# Altium PCB PCB1.PcbDoc
Units mm, origin at the board's own origin, x right, y up, seen from the top; angles counter-clockwise.
Board outline 91.78 x 55.02 mm, 2 copper layers (Top Layer, Bottom Layer); 18 components, 17 nets, 57 pads, 0 vias.
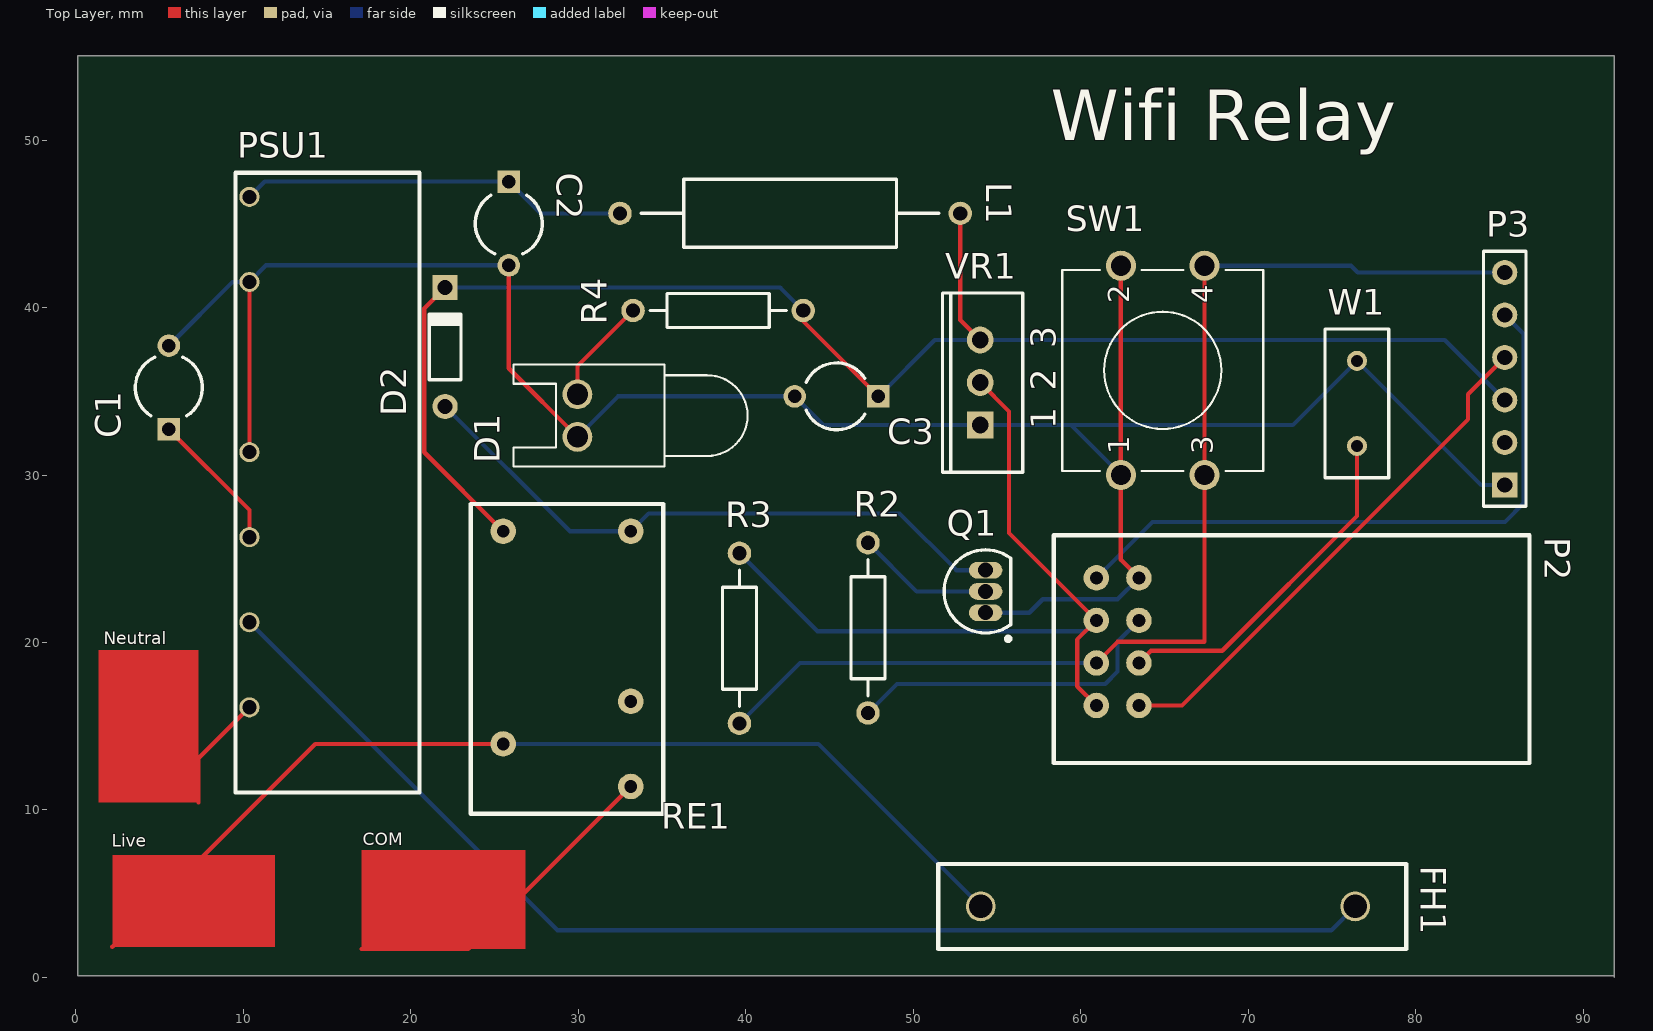
[diagram p0: Top Layer view]
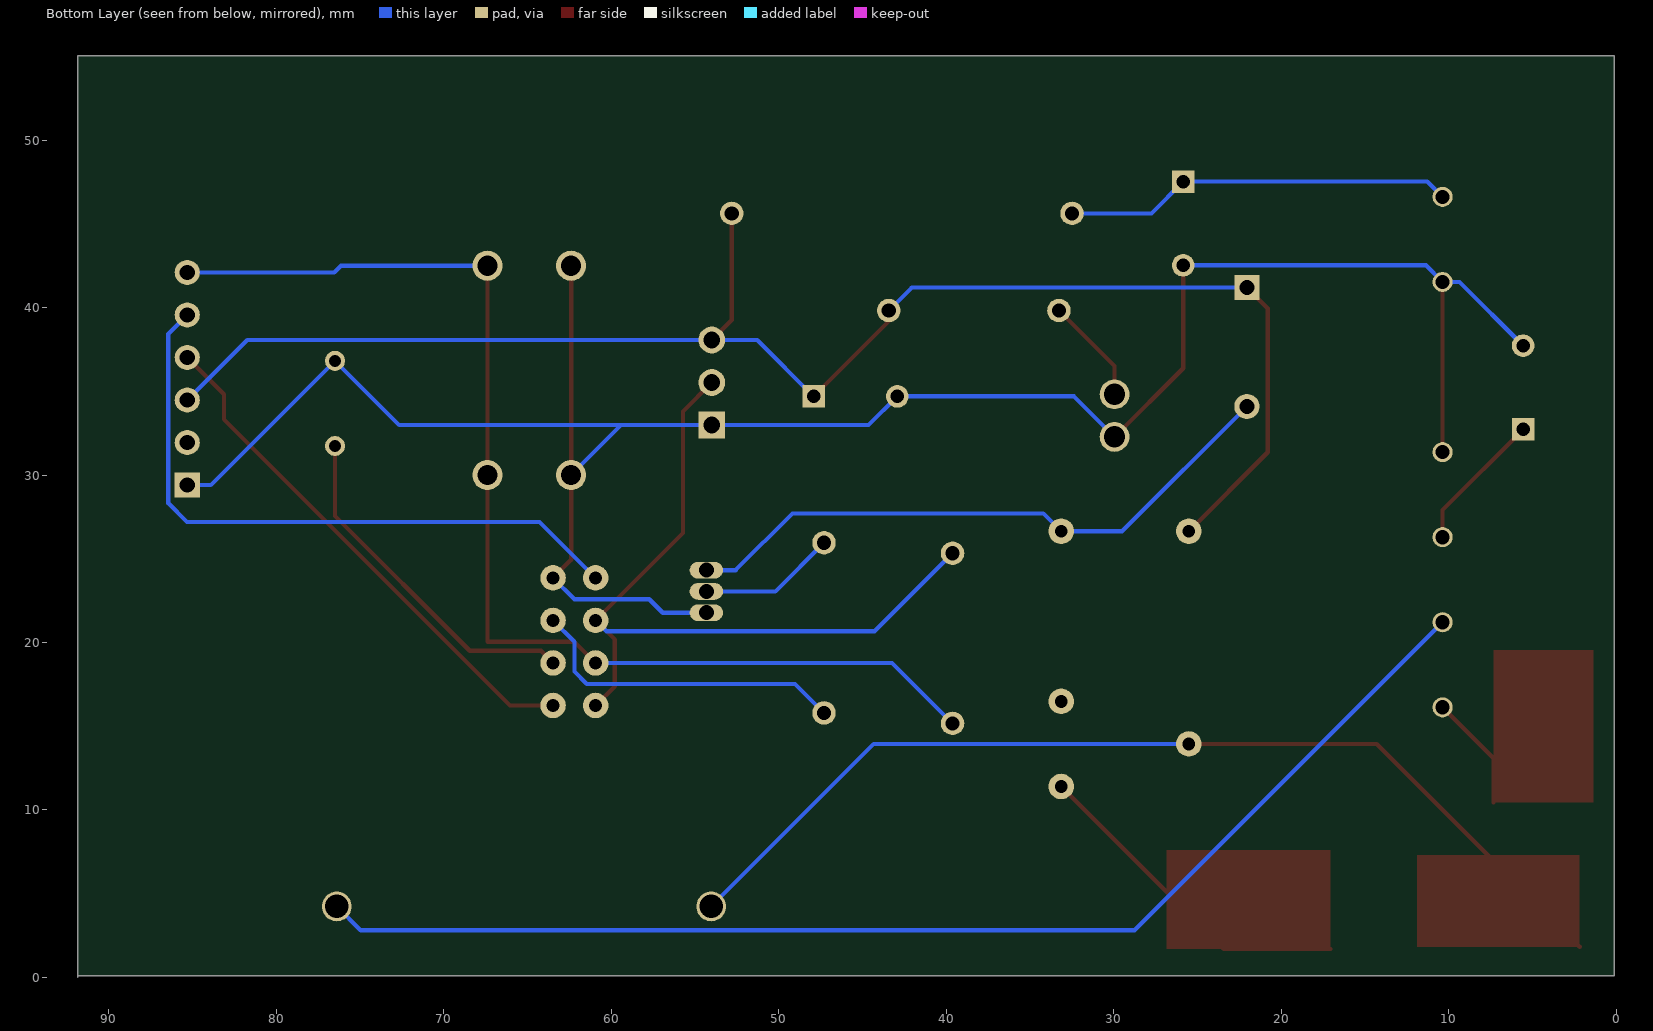
[diagram p1: Bottom Layer view, seen from below]

## Layer stack, top to bottom
Top Solder: solder mask 0.0102, Solder Resist, Dk 3.5
Top Layer: signal copper 0.0356
Dielectric 1: dielectric 0.32, FR-4, Dk 4.8
Bottom Layer: signal copper 0.0356
Bottom Solder: solder mask 0.0102, Solder Resist, Dk 3.5

## Board outline
0.125,55.05 91.875,55.05 91.875,0.025 91.875,0.1 0.1,0.1

## Design rules (kind name [scope] priority, off if disabled: settings)
Clearance [All] p1: gap=0.254
PolygonConnect [All] p1: connectstyle=Relief reliefconductorwidth=0.254 reliefentries=4 polygonreliefangle="90 Angle" airgapwidth=0.254
RoomDefinition Sheet1 [InComponentClass('Sheet1')] p1: confinementstyle=ConfineIn formatcopy=TRUE lockcomponents=FALSE outline 0.1,0.1 91.775,0.1 91.775,54.775 0.1,54.775
RoutingVias [All] p1: holewidth=0.711 width=1.27 viastyle="Through Hole" minholewidth=0.711 minwidth=1.27 maxholewidth=0.711 maxwidth=1.27
SolderMaskExpansion [All] p1: expansion=0.102
Width [All] p1: maxlimit=0.254 minlimit=0.254 preferedwidth=0.254
30 further rules are at their usual default settings.

## Components (designator, comment, footprint, x,y, rotation, side; value= is the part's Value field where it differs from the comment)
C1 "Cap Pol1" CAPR5-4X5 5.55,35.225 r90 top
C2 "Cap Pol1" CAPR5-4X5 25.85,45.025 r270 top
C3 "Cap Pol1" CAPR5-4X5 45.425,34.7 r180 top
D1 "LED0" LED-0 29.95,33.55 r90 top
D2 "Comment" DO-35 22.05,37.65 r90 top
FH1 "Fuse Holder" "Fuse Holder" 51.5,1.7 r0 top
L1 "Inductor" AXIAL-0.8 42.65,45.625 r0 top
P2 "ESP8266" ESP8266 58.4,26.4 r270 top
P3 "FTDI" HDR1X6 85.325,29.4 r90 top
PSU1 "PBK-3-5" PBK-3-5 20.525,11.05 r90 top
Q1 "2N2222" TO-92A 54.325,23.05 r0 top
R2 "Res2" AXIAL-0.4 47.3,20.875 r90 top
R3 "Res2" AXIAL-0.4 39.625,20.25 r90 top
R4 "Res2" AXIAL-0.4 38.35,39.825 r180 top
RE1 "Relay" Relay 35.075,28.275 r180 top
SW1 "RESET" 430456085736 64.9,36.25 r90 top
VR1 "LM1117" TO-220-AB 54,35.525 r90 top
W1 "FLASH" RAD-0.2 76.5,34.275 r90 top

## Footprints (in the part's own frame and the unit in brackets; to place one, negate y for a bottom-side part, rotate by r counter-clockwise, add the part's x,y. Pads: shape width x height; smd on the part's side, far side on the other; paste and mask are expansions set on the pad)
430456085736 [mm] "12*12mm vertical type,THT,  height 8.5mm, salmon actuator, 360gf, Bulk"
  round 1.8 hole 1.2: 1(-6.25,2.5) 2(6.25,2.5) 3(-6.25,-2.5) 4(6.25,-2.5)
  silkscreen extent -6,-6 6,6, body extent -6.99,-6 6.99,6, height 8.6
AXIAL-0.4 [mm] "Axial Device, Thru-Hole; 2 Leads; 0.4 in Pin Spacing"
  round 1.4 hole 0.85: 1(-5.08,0) 2(5.08,0)
  silkscreen extent -4.06,-1.02 4.06,1.02
AXIAL-0.8 [mm] "Axial Device, Thru-Hole; 2 Leads; 0.8 in Pin Spacing"
  round 1.4 hole 0.85: 1(-10.16,0) 2(10.16,0)
  silkscreen extent -8.89,-2.03 8.89,2.03
CAPR5-4X5 [mm] "Capacitor; 2 Leads"
  rect 1.35x1.35 hole 0.8: 1(-2.5,0)
  round 1.35 hole 0.8: 2(2.5,0)
  silkscreen extent -1.69,-2 1.82,2
DO-35 [mm] "Diode, Axial; Body 3.8 x 1.9 mm (LxDia. max), Lead Dia. 0.53 mm (max)"
  round 1.5 hole 0.9: 1(-3.55,0)
  rect 1.5x1.5 hole 0.9: 2(3.55,0)
  silkscreen extent -1.95,-0.95 2.05,0.95
ESP8266 [mil]
  round 60 hole 30: 1(100,200) 2(200,200) 3(300,200) 4(400,200) 5(100,100) 6(200,100) 7(300,100) 8(400,100)
  silkscreen extent 0,0 535,1118
"Fuse Holder" [mil] "5mm x 20mm"
  round 70 hole 55: 1(100,100) 2(980,100)
  silkscreen extent 0,0 1100,200
HDR1X6 [mm] "Connector; Header; 6 Position"
  rect 1.5x1.5 hole 0.9: 1(0,0)
  round 1.5 hole 0.9: 2(2.54,0) 3(5.08,0) 4(7.62,0) 5(10.16,0) 6(12.7,0)
  silkscreen extent -1.27,-1.27 13.97,1.27
LED-0 [mil] "LED; 2 Leads"
  round 70 hole 50: 1(50,0) 2(-50,0)
  silkscreen extent -120,-400 120,150
PBK-3-5 [mm] "120Vac to 5VDC"
  round 1.2 hole 0.85: 1(5.08,10.16) 3(10.16,10.16) 5(15.24,10.16) 7(20.32,10.16) 10(30.48,10.16) 12(35.56,10.16)
  silkscreen extent 0,0 37,11
RAD-0.2 [mm] "Radial Cap, Thru-Hole; 2 Leads; 0.2 in Pin Spacing"
  round 1.2 hole 0.7: 1(-2.54,0) 2(2.54,0)
  silkscreen extent -4.44,-1.91 4.45,1.9
Relay [mil]
  round 60 hole 30: 1(76.38,64.17) 2(376.38,64.17) 3(76.38,464.17) 4(76.38,664.17) 5(376.38,564.17)
  silkscreen extent 0,0 453,728
TO-92A [mm] "TO, Flat Index; 3 In-Line, Axial Leads; Body Dia. 4.5mm; Leads 0.51 x 0.48 mm (max)"
  oval 2x1 hole 0.9: 1(0,-1.27) 2(0,0) 3(0,1.27)
  silkscreen extent -2.48,-2.95 1.5,2.48, body extent -2.5,-2.5 1.5,2.5, height 6.86
TO-220-AB [mm] "TO, Thru-Hole, Vertical, Heatsink Mounted; 3 In-Line Leads; Pitch 2.54 mm"
  rect 1.6x1.6 hole 1: 1(-2.54,0)
  round 1.6 hole 1: 2(0,0) 3(2.54,0)
  silkscreen extent -5.35,-2.55 5.35,2.25

## Part data
C1 C2 C3: "Polarized Capacitor (Radial)"
D1: "Typical INFRARED GaAs LED"
D2: library part "Diode 1N914", "High Conductance Fast Diode"
P2: library part "Header 4X2A", "Header, 4-Pin, Dual row"
P3: library part "Header 6", "Header, 6-Pin"
PSU1: "120Vac to 5Vdc psu"
Q1: library part 2N3904, "NPN General Purpose Amplifier"
R2 R3 R4: "Resistor"
SW1: library part "WE-Tact Switches WS-TATV 430456085736", "WS-TATV THT Tact Switch 12X12 mm"
VR1: library part "Volt Reg", "Voltage Regulator"
W1: library part Jumper, "Jumper Wire"

## Nets (pads, with @x,y where several pads share a name; then routed paths per layer and width w, separated by ;. In a path a pad name is that pad's centre, name@x,y a point inside that pad or via, vN(x,y) a via of type N, cw(c..) or ccw(c..) an arc to the next point about the centre after c; other vN are vias at no path point)
3V3: P2.6 P2.8 R3.2 VR1.2 | length 46.6
  Top Layer w0.254: VR1.2 55.728,33.797 55.728,26.532 P2.6 59.792,20.172 59.792,17.388 P2.8
  Bottom Layer w0.254: R3.2 44.279,20.676 60.296,20.676 P2.6
GND: C1.2 C2.2 C3.2 D1.2 P2.1 P3.1 PSU1.7 PSU1.10 Q1.1 SW1.1 SW1.2 VR1.1 W1.2 | length 139.5
  Top Layer w0.254: PSU1.7 PSU1.10 ; C2.2 25.85,36.38 D1.2 ; SW1.2 SW1.1 62.4,24.94 P2.1
  Bottom Layer w0.254: C1.2 9.355,41.53 PSU1.10 11.36,42.525 C2.2 ; D1.2 32.37,34.7 C3.2 44.64,32.985 VR1.1 59.415,32.985 ; Q1.1 56.934,21.78 57.734,22.581 62.201,22.581 P2.1 ; SW1.1 59.415,32.985 ; P3.1 83.915,29.4 W1.2 72.67,32.985 59.415,32.985
GPIO0: P2.3 W1.1 | length 20.8
  Top Layer w0.254: P2.3 64.207,19.507 68.453,19.507 76.5,27.554 W1.1
GPIO2: P2.2 R2.1 | length 19.5
  Bottom Layer w0.254: R2.1 49.031,17.526 61.468,17.526 62.205,18.263 62.205,20.045 P2.2
LIVE: FH1.1 RE1.5 | length 60.9
  Top Layer w0.254: 2.175,1.825 14.295,13.945 RE1.5
  Bottom Layer w0.254: RE1.5 44.335,13.945 FH1.1
NetC1_1: C1.1 PSU1.5 | length 8.4
  Top Layer w0.254: C1.1 10.365,27.91 PSU1.5
NetC2_1: C2.1 L1.1 PSU1.12 | length 23.3
  Bottom Layer w0.254: PSU1.12 11.28,47.525 C2.1 27.75,45.625 L1.1
NetD1_1: D1.1 R4.2 | length 6.4
  Top Layer w0.254: D1.1 29.95,36.505 R4.2
NetD2_1: D2.1 Q1.3 RE1.1 | length 37.2
  Bottom Layer w0.254: D2.1 29.505,26.645 RE1.1 34.201,27.711 49.187,27.711 52.578,24.32 Q1.3
NetFH1_2: FH1.2 PSU1.3 | length 74.2
  Bottom Layer w0.254: PSU1.3 28.756,2.819 74.971,2.819 FH1.2
NetQ1_2: Q1.2 R2.2 | length 8.2
  Bottom Layer w0.254: R2.2 50.205,23.05 Q1.2
NEUTRAL: PSU1.1 | length 6.9
  Top Layer w0.254: 7.325,10.45 7.325,13.09 PSU1.1
NO: RE1.4 | length 20.1
  Top Layer w0.254: 17.05,1.7 23.43,1.7 RE1.4
RST: P2.7 P3.6 R3.1 SW1.3 SW1.4 | length 70.3
  Top Layer w0.254: P2.7 62.201,20.041 67.386,20.041 67.4,20.054 SW1.3 SW1.4
  Bottom Layer w0.254: R3.1 43.235,18.78 P2.7 ; SW1.4 76.149,42.5 76.549,42.1 P3.6
RXD: P2.4 P3.4 | length 31.3
  Top Layer w0.254: P2.4 66.049,16.24 83.134,33.325 83.134,34.829 P3.4
TXD: P2.5 P3.5 | length 39.1
  Bottom Layer w0.254: P2.5 64.283,27.203 85.344,27.203 86.462,28.321 86.462,38.423 P3.5
VCC: C3.1 D2.2 L1.2 P3.3 R4.1 RE1.2 VR1.3 | length 94.3
  Top Layer w0.254: D2.2 20.803,39.953 20.803,31.357 RE1.2 ; R4.1 43.43,39.195 C3.1 ; L1.2 52.81,39.255 VR1.3
  Bottom Layer w0.254: D2.2 42.055,41.2 R4.1 ; C3.1 51.29,38.065 VR1.3 81.74,38.065 P3.3
pads on no net: P3.2 RE1.3

## Other copper
Top Layer:
  rectangle net NO: 17.05,1.7 26.85,7.6
  region net NEUTRAL: 7.325,10.45 7.325,19.55 1.35,19.55 1.35,10.45
  rectangle net LIVE: 2.175,1.825 11.9,7.325

## Silkscreen, mask and mechanical layers (free items; w line width, h text height)
Top Overlay:
  text "Wifi Relay" at 58.2,50 h3
  text "Neutral" at 1.65,19.9 h0.75
  text "COM" at 17.125,7.9 h0.75
  text "Live" at 2.15,7.8 h0.75

## Text inside footprints (layer, text, board x,y; h text height)
SW1: Top Overlay "4" at 67.9,40.25 h1.27 r90; Top Overlay "3" at 67.9,31.25 h1.27 r90; Top Overlay "2" at 62.9,40.25 h1.27 r90; Top Overlay "1" at 62.9,31.25 h1.27 r90
VR1: Top Overlay "3" at 58.525,37.565 h1.5 r90; Top Overlay "2" at 58.525,35.025 h1.5 r90; Top Overlay "1" at 58.525,32.735 h1.5 r90